# EAGLE board servo_1 (EAGLE 6.5.0)
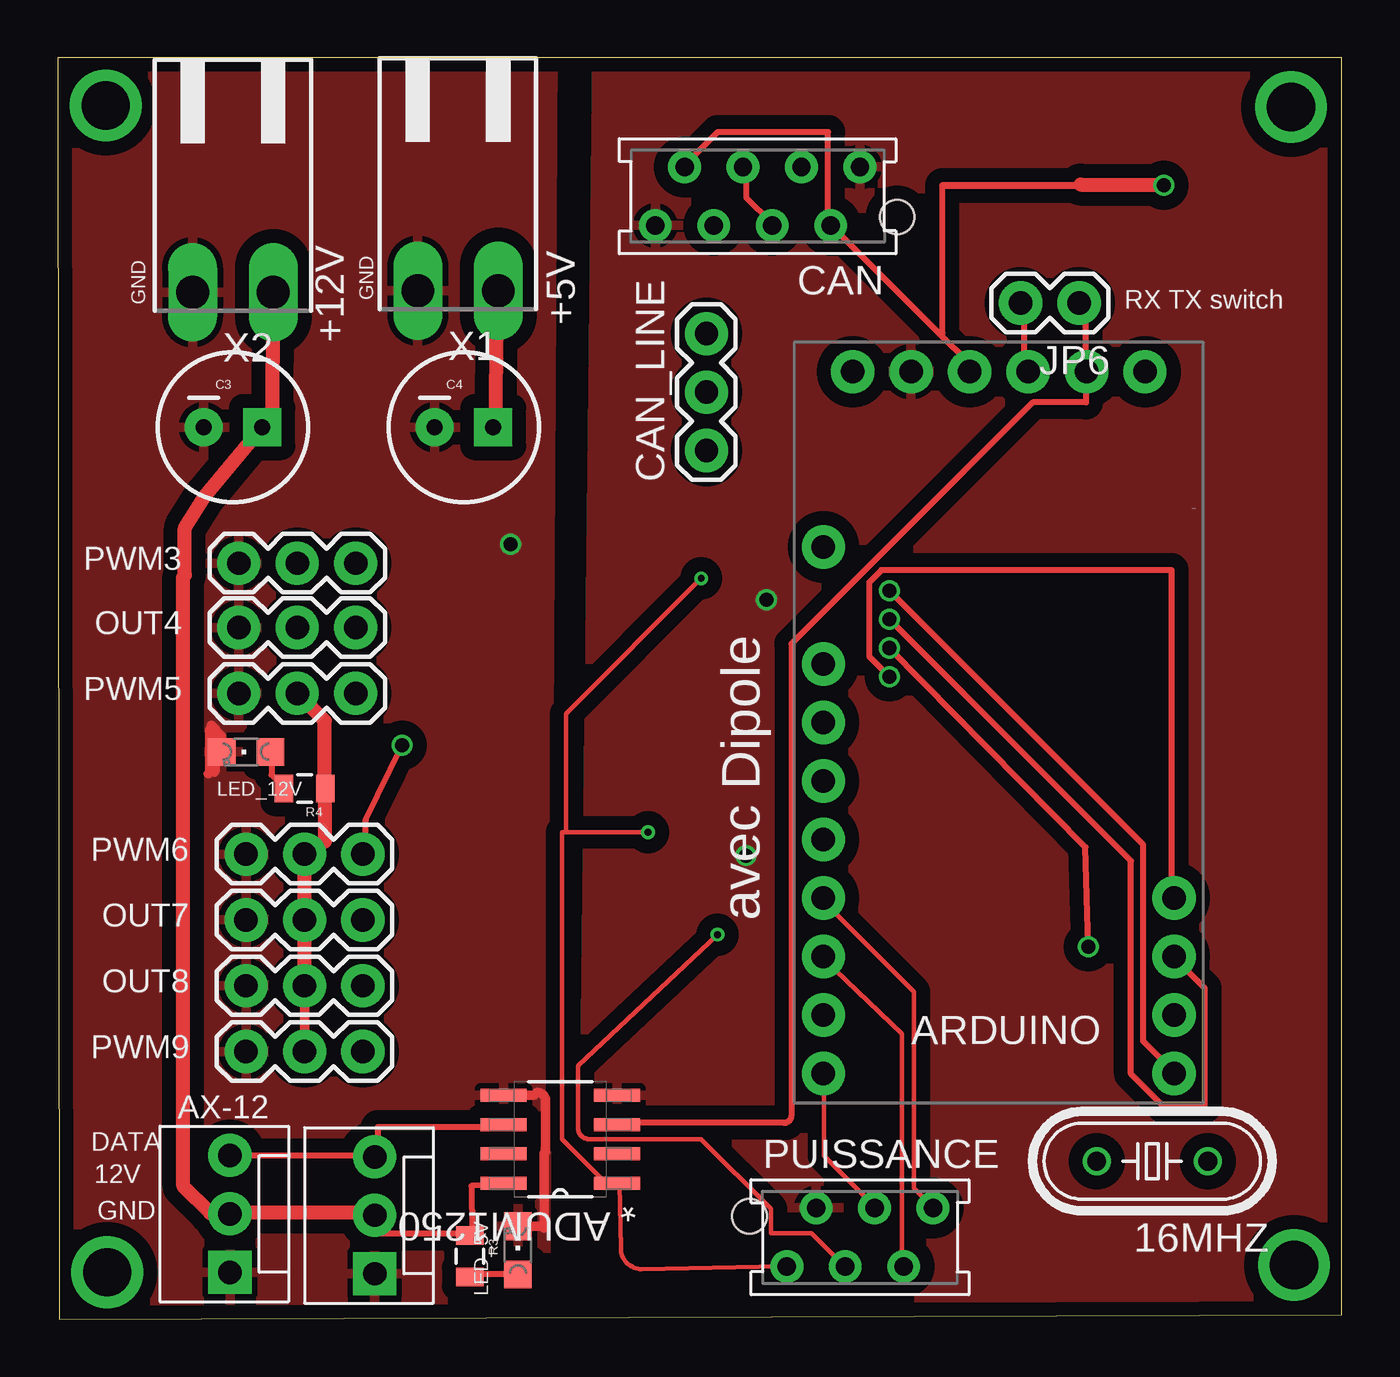
[diagram p0: board, top side]
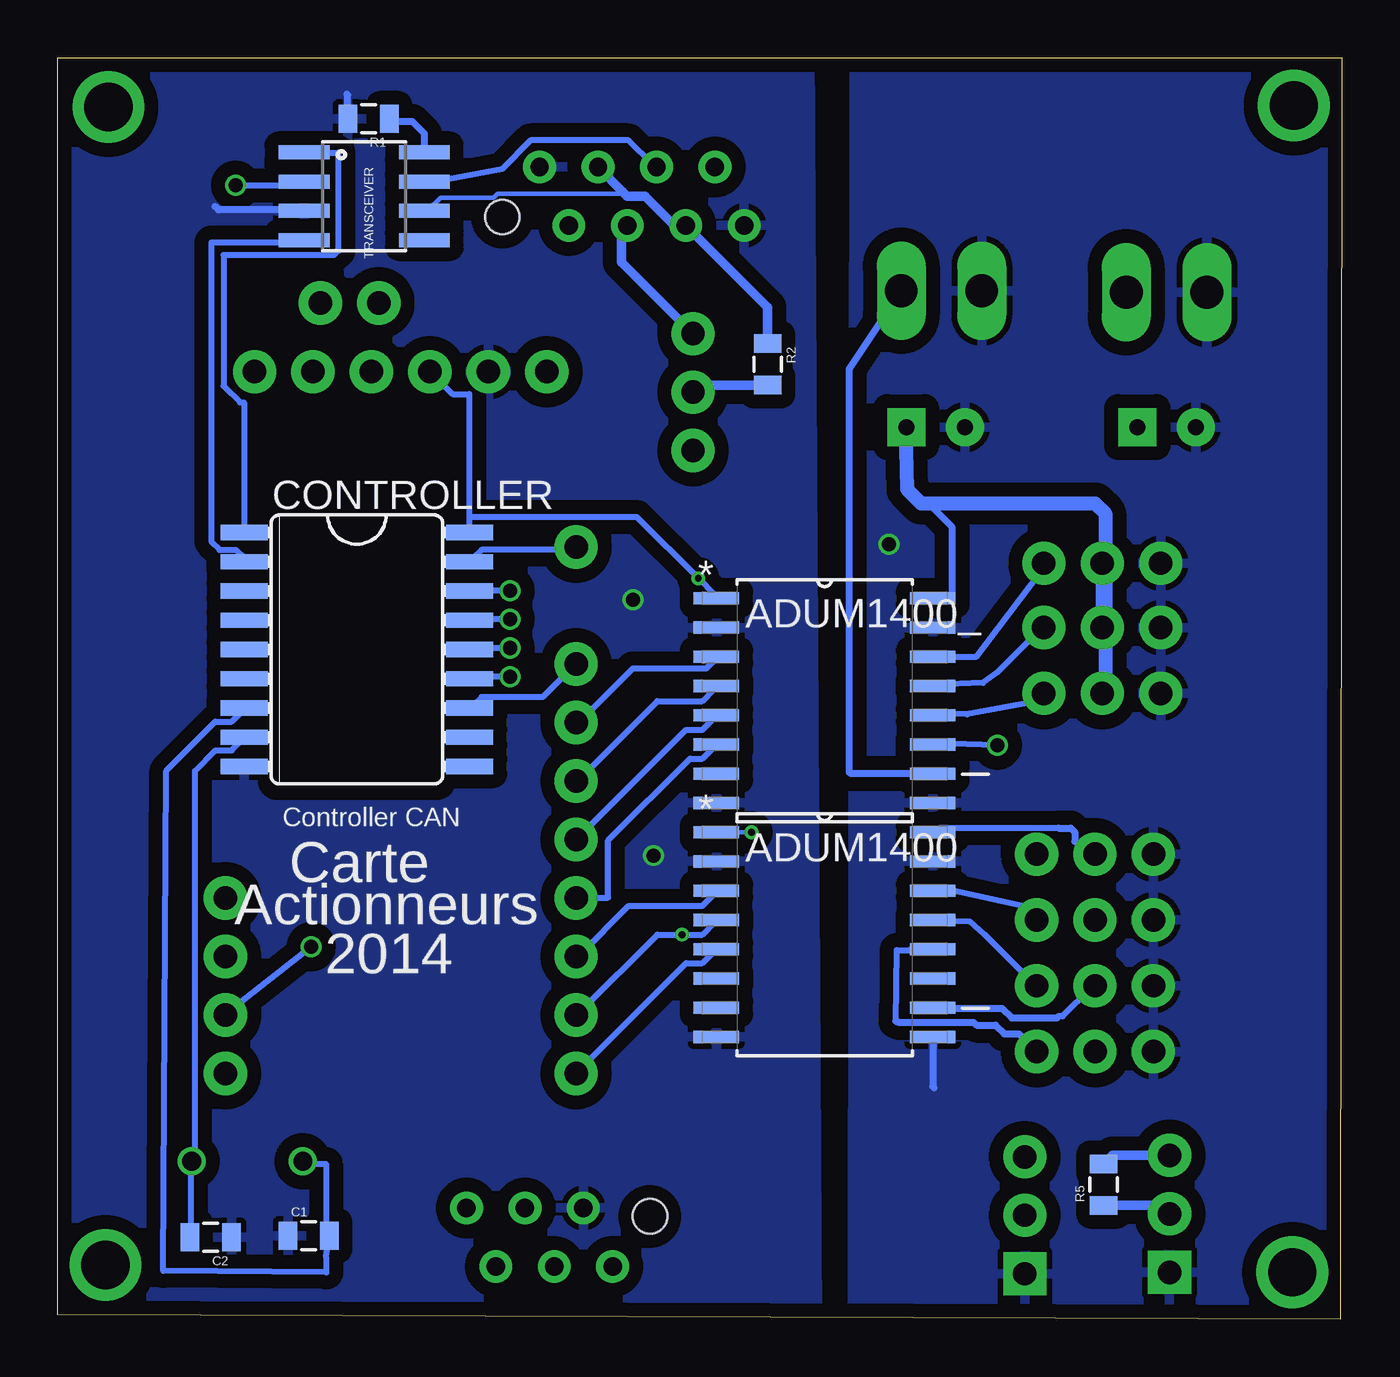
[diagram p1: board, bottom side, seen from below]

Size 55.8 x 54.79 mm. Coordinates in mm from the lower left corner, seen from the top.
Outline: 0.06,0 55.8,0.19 55.8,54.79 0,54.79 0.06,0
Copper layers (1*16): Top 0.035mm / dielectric 1.6mm / Bottom 0.035mm
Design rules "dipole": minimum track width 0.2mm, minimum drill 0.3mm, track to track 0.15mm, track to pad 0.15mm, pad to pad 0.15mm, via to via 0.15mm, smd to smd 0.01mm, copper to edge 0.01mm, drill to drill 0.01mm, minimum pad ring 0.15mm, minimum via ring 0.15mm, stop-mask expansion 1mil, vias tented up to drill 0mil, thermal gap 10mil
Net classes: 0 default: clearance 0.205 mm
bRestrict: area 39.3,23.4 to 46.3,34.5

## Footprints (pad centres in the part's own frame; a part is rotated, then mirrored left to right if it is on the bottom)
HC49/S = drill 0.813: 1 -2.413,0; 2 2.413,0
SOIC127P600X175-8N = smd 1.981 x 0.559: 1 -2.464,1.905; 2 -2.464,0.635; 3 -2.464,-0.635; 4 -2.464,-1.905; 5 2.464,-1.905; 6 2.464,-0.635; 7 2.464,0.635; 8 2.464,1.905
SOIC127P1032X265-16N = smd 1.981 x 0.533: 1 -4.699,4.445; 2 -4.699,3.175; 3 -4.699,1.905; 4 -4.699,0.635; 5 -4.699,-0.635; 6 -4.699,-1.905; 7 -4.699,-3.175; 8 -4.699,-4.445; 9 4.699,-4.445; 10 4.699,-3.175; 11 4.699,-1.905; 12 4.699,-0.635; 13 4.699,0.635; 14 4.699,1.905; 15 4.699,3.175; 16 4.699,4.445
ARDUINO_PRO_MINI = drill 1.016 pad 1.88: 3 -7.62,7.62; 5 -7.62,2.54; 6 -7.62,0; 7 -7.62,-2.54; 8 -7.62,-5.08; 9 -7.62,-7.62; 10 -7.62,-10.16; 11 -7.62,-12.7; 12 -7.62,-15.24; 13 7.62,-15.24; 14 7.62,-12.7; 15 7.62,-10.16; 16 7.62,-7.62; BLK -6.35,15.24; GND -3.81,15.24; GRN 6.35,15.24; RXI 1.27,15.24; TXO 3.81,15.24; VCC -1.27,15.24
0805 = smd 0.8 x 1.2: 1 -0.9,0; 2 0.9,0
CPOL-RADIAL-100UF-25V = drill 0.7 pad 1.651 square: 1 1.27,0 | drill 0.7 pad 1.651: 2 -1.27,0
AMP-215079-8 = drill 0.8 pad 1.422: 1 0,-1.27; 2 1.27,1.27; 3 2.54,-1.27; 4 3.81,1.27; 5 5.08,-1.27; 6 6.35,1.27; 7 7.62,-1.27; 8 8.89,1.27 | hole 1.5: -1.62,0.905
1X03 = drill 1.016 pad 1.88: 1 0,0; 2 2.54,0; 3 5.08,0
SO18L = smd 0.66 x 2.032: 1 -5.08,-4.902; 2 -3.81,-4.902; 3 -2.54,-4.902; 4 -1.27,-4.902; 5 0,-4.902; 6 1.27,-4.902; 7 2.54,-4.902; 8 3.81,-4.902; 9 5.08,-4.902; 10 5.08,4.902; 11 3.81,4.902; 12 2.54,4.902; 13 1.27,4.902; 14 0,4.902; 15 -1.27,4.902; 16 -2.54,4.902; 17 -3.81,4.902; 18 -5.08,4.902
MOLEX-1X3 = drill 1.016 pad 1.88 square: 1 0,0 | drill 1.016 pad 1.88: 2 2.54,0; 3 5.08,0
1X02 = drill 1.016 pad 1.88: 1 0,0; 2 2.54,0
CHIPLED_0805 = smd 1.2 x 1.2: A 0,-1.05; C 0,1.05
AMP-215079-6 = drill 0.8 pad 1.422: 1 0,0; 2 1.27,2.54; 3 2.54,0; 4 3.81,2.54; 5 5.08,0; 6 6.35,2.54 | hole 1.5: -1.62,2.175
SO08 = smd 0.61 x 2.21: 1 -1.905,-2.616; 2 -0.635,-2.616; 3 0.635,-2.616; 4 1.905,-2.616; 5 1.905,2.616; 6 0.635,2.616; 7 -0.635,2.616; 8 -1.905,2.616
90-2 = drill 1.422 long: 1 -1.75,5.25; 2 1.75,5.25

## Placement (x,y rotation side)
16MHZ  16MHz  [HC49/S]  47.56,6.86 180 top
ADUM1250  ADUM1250ARZ  [SOIC127P600X175-8N]  21.84,7.81 180 top
ADUM1400  ADUM1400ARWZ  [SOIC127P1032X265-16N]  22.48,16.7 0 bottom
ADUM1400_  ADUM1400ARWZ  [SOIC127P1032X265-16N]  22.48,26.86 0 bottom
ARDUINO  ARDUINO_PRO_MINI'SERVO  [ARDUINO_PRO_MINI]  40.89,25.91 0 top
C1  22pF  [0805]  44.89,3.62 0 bottom
C2  22pF  [0805]  49.15,3.56 180 bottom
C3  100uF  [CPOL-RADIAL-100UF-25V]  7.62,38.73 0 top
C4  100uF  [CPOL-RADIAL-100UF-25V]  17.65,38.73 0 top
CAN  [AMP-215079-8]  34.86,48.77 180 top
CAN_LINE  JUMPER-3PTH  [1X03]  28.19,37.72 90 top
CONTROLLER  MCP2515SO  [SO18L]  42.8,29.08 270 bottom
JP2  AX-12_1  [MOLEX-1X3]  13.78,1.97 90 top
JP4  AX-12_2  [MOLEX-1X3]  7.49,2.03 90 top
JP6  RX_TX_Connxion  [1X02]  44.39,44.13 180 top
LED_5V  [CHIPLED_0805]  20,2.98 0 top
LED_12V  [CHIPLED_0805]  8.19,24.64 90 top
OUT4  PWM4  [1X03]  12.95,30.04 180 top
OUT7  PWM7  [1X03]  13.27,17.34 180 top
OUT8  servo_option_1  [1X03]  13.27,14.48 180 top
PUISSANCE  MMATCH-6-  [AMP-215079-6]  31.69,2.29 0 top
PWM3  PWM3  [1X03]  12.95,32.83 180 top
PWM5  PWM5  [1X03]  12.95,27.18 180 top
PWM6  servo_option  [1X03]  13.27,20.19 180 top
PWM9  servo_option_2  [1X03]  13.27,11.62 180 top
R1  4,7k  [0805]  42.29,52.13 180 bottom
R2  120  [0805]  24.96,41.47 270 bottom
R3  1k  [0805]  17.91,2.73 270 top
R4  1k  [0805]  10.73,23.05 180 top
R5  10k  [0805]  10.35,5.84 90 bottom
TRANSCEIVER  MCP2551  [SO08]  42.48,48.77 270 bottom
X1  5V_INPUT  [90-2]  17.4,49.91 180 top
X2  12V_INPUT  [90-2]  7.62,49.85 180 top

## Library data of the parts
16MHZ = adafruit; MF: MULTICOMP; MPN: HC49SM-3.6864-30-50-60-16-ATF; OC_FARNELL: 1667008; OC_NEWARK: unknown
ADUM1250 = Analog Devices_By_element14_Batch_1; MF: ANALOG DEVICES; MPN: ADUM1250ARZ; OC_FARNELL: 1814353; OC_NEWARK: 27M9880; PACKAGE: SOIC-8; SUPPLIER: Analog Devices
ADUM1400 ADUM1400_ = Analog Devices_By_element14_Batch_1; MF: ANALOG DEVICES; MPN: ADUM1400ARWZ; OC_FARNELL: 1226217; OC_NEWARK: 19M8755; PACKAGE: SOIC-16; SUPPLIER: Analog Devices
ARDUINO = can_bus_servo; OC_FARNELL: unknown
C1 C2 = SparkFun-Capacitors; MF: AVX; MPN: 08055A220JAT2A; OC_FARNELL: 2280675RL
C3 C4 = SparkFun-Capacitors; MF: RUBYCON; MPN: 100TXW100MEFC8X30; OC_FARNELL: 2346289
CAN = jt-con-micromatch; OC_FARNELL: unknown
CAN_LINE = SparkFun-Passives
CONTROLLER = MCP2515_MT; OC_FARNELL: unknown
JP2 JP4 OUT4 OUT7 OUT8 PWM3 PWM5 PWM6 PWM9 = SparkFun-Connectors; OC_FARNELL: unknown
JP6 R1-R5 = SparkFun-Passives; OC_FARNELL: unknown
LED_5V LED_12V = adafruit
PUISSANCE = jt-con-micromatch
TRANSCEIVER = SparkFun-DigitalIC; MF: MICROCHIP; MPN: MCP2551-I/SN...; OC_FARNELL: 2119745
X1 X2 = con-weidmueller-sl35; OC_FARNELL: unknown; OC_NEWARK: unknown

## Nets
5V_DIRTY: ADUM1400.10 ADUM1400.16 ADUM1400_.10 ADUM1400_.16 C4.1 OUT4.2 OUT7.2 OUT8.2 PWM3.2 PWM5.2 PWM6.2 PWM9.2 R4.1 X1.1
12V_DIRTY: ADUM1250.8 C3.1 JP2.2 JP4.2 R3.1 R5.1 X2.1
CAN_CS: ARDUINO.13 CONTROLLER.16
CAN_INT: ARDUINO.5 CONTROLLER.12
CAN_RXD: CONTROLLER.2 TRANSCEIVER.4
CAN_TXD: CONTROLLER.1 TRANSCEIVER.1
CANH: CAN.4 CAN.5 CAN_LINE.3 TRANSCEIVER.7
CANL: CAN.3 CAN.6 R2.1 TRANSCEIVER.6
GND: ADUM1250.4 ADUM1400.2 ADUM1400.8 ADUM1400_.2 ADUM1400_.8 ARDUINO.GND C1.1 C2.1 CAN.1 CAN.8 CONTROLLER.9 PUISSANCE.2 R1.2 TRANSCEIVER.3
GND_DIRTY: ADUM1250.5 ADUM1400.9 ADUM1400.15 ADUM1400_.9 ADUM1400_.15 C3.2 C4.2 JP2.1 JP4.1 LED_5V.C LED_12V.C OUT4.3 OUT7.3 OUT8.3 PWM3.3 PWM5.3 PWM6.3 PWM9.3 X1.2 X2.2
MISO: ARDUINO.15 CONTROLLER.15
MOSI: ARDUINO.14 CONTROLLER.14
N$2: 16MHZ.2 C1.2 CONTROLLER.7
N$3: 16MHZ.1 C2.2 CONTROLLER.8
N$4: LED_5V.A R3.2
N$5: R1.1 TRANSCEIVER.8
N$6: LED_12V.A R4.2
N$7: CAN_LINE.2 R2.2
OUT4: ADUM1400_.4 ARDUINO.7
OUT7: ADUM1400.3 ARDUINO.10 PUISSANCE.5
OUT8: ADUM1400.4 ARDUINO.11 PUISSANCE.3
PWM3: ADUM1400_.3 ARDUINO.6
PWM3_OUT: ADUM1400_.14 PWM3.1
PWM4_OUT: ADUM1400_.13 OUT4.1
PWM5: ADUM1400_.5 ARDUINO.8
PWM5_OUT: ADUM1400_.12 PWM5.1
PWM6: ADUM1400_.6 ARDUINO.9 PUISSANCE.6
PWM6_OUT: ADUM1400_.11 PWM6.1
PWM7_OUT: ADUM1400.14 OUT7.1
PWM8_OUT: ADUM1400.13 OUT8.1
PWM9: ADUM1400.5 ARDUINO.12 PUISSANCE.4
PWM9_OUT: ADUM1400.12 PWM9.1
RST: ARDUINO.3 CONTROLLER.17
RXI: ARDUINO.RXI JP6.2
RXTX_OUT: ADUM1250.6 JP2.3 JP4.3 R5.2
SCK: ARDUINO.16 CONTROLLER.13
TXO: ADUM1250.3 ARDUINO.TXO JP6.1
VCC: ADUM1250.1 ADUM1400.1 ADUM1400_.1 ARDUINO.VCC CAN.2 CAN.7 CONTROLLER.18 PUISSANCE.1 TRANSCEIVER.2

## Tracks (layer width: path | path; a pad name or v marks a point on that pad's centre or on a via)
5V_DIRTY
  Top 0.254: 19.08,43.37 X1.1 | 11.61,22.92 R4.1 11.61,23.1 | 10.9,19.9 PWM6.2 10.72,19.72 | 10.72,17.41 OUT7.2 10.72,17.23 | 10.54,27.01 PWM5.2 | 10.72,14.57 OUT8.2
  Top 0.406: 10.72,14.76 arc-5 10.8,14.48 10.8,14.67 10.73,14.73 10.73,11.68 10.8,11.62 PWM9.2 10.67,11.56
  Top 0.61: PWM5.2 11.61,25.98 11.61,22.92 11.61,20.75 PWM6.2 | 10.72,19.72 10.72,17.35 OUT7.2 | 10.72,17.23 10.72,14.76 10.72,14.49 OUT8.2 | 19.08,43.37 19.01,38.76 C4.1
  Bottom 0.254: 17.83,31.46 ADUM1400_.16 | 18.96,38.6 C4.1 | 12.32,13.14 12.14,13.14 10.9,14.39 OUT8.2 | 10.9,11.72 PWM9.2 | 12.32,21.32 17.48,21.32 17.65,21.15 ADUM1400.16 | 10.9,19.9 PWM6.2 | 17.65,13.5 ADUM1400.10
  Bottom 0.305: 17.65,13.5 14.77,13.5 14.35,13.08 12.38,13.08 12.32,13.14 | ADUM1400_.10 21.34,23.69 21.4,23.75 21.4,41.27 X1.1 | 18.29,35.43 17.97,35.43 16.95,34.42 16.95,31.37 17.08,31.24 17.72,31.24 ADUM1400_.16 | 12.32,21.32 11.79,21.32 11.61,21.15 11.61,20.75 PWM6.2
  Bottom 0.61: 18.96,38.6 18.9,36.04 18.29,35.43 10.73,35.43 10.29,34.99 10.29,32.7 | 10.29,32.7 10.29,27.3 PWM5.2 | 10.29,32.7 PWM3.2 OUT4.2
12V_DIRTY
  Top 0.254: ADUM1250.8 19.25,5.85 17.98,5.79 18.01,3.72 R3.1 17.83,3.72 13.92,3.72 13.92,4.43 JP2.2 13.74,4.61 | 7.52,4.61 JP4.2 7.34,4.61
  Top 0.61: X2.1 9.31,38.45 C3.1 6.41,35.75 5.52,34.35 5.52,32.32 5.46,32.26 5.46,5.78 6.63,4.61 7.53,4.61 | 13.74,4.61 7.53,4.61 | 7.53,4.61 JP4.2
  Bottom 0.406: R5.1 7.86,4.94 JP4.2
CAN_CS  (via drill 0.61)
  Top 0.254: v36.14,31.64 47.17,20.61 47.17,12.08 48.41,10.83 ARDUINO.13
  Bottom 0.254: v36.14,31.64 37.74,31.64 CONTROLLER.16
CAN_INT
  Bottom 0.254: CONTROLLER.12 37.74,26.66 37.39,27.01 34.72,27.01 33.3,28.44 ARDUINO.5
CAN_RXD
  Bottom 0.254: CONTROLLER.2 47.7,33.06 48.06,33.41 48.77,33.41 49.12,33.77 49.12,46.75 45.21,46.75 TRANSCEIVER.4
CAN_TXD
  Bottom 0.254: CONTROLLER.1 47.7,39.81 47.88,39.81 48.59,40.53 48.59,46.22 43.79,46.22 43.61,46.39 43.61,50.66 45.03,50.66 TRANSCEIVER.1
CANH
  Top 0.254: CAN.4 30.99,47.64 29.92,48.7 29.92,49.95 CAN.5
  Bottom 0.254: TRANSCEIVER.7 39.7,49.42 39.17,49.44 36.5,49.95 35.26,51.19 30.99,51.19 29.92,50.13 CAN.5
  Bottom 0.406: CAN_LINE.3 31.31,45.91 31.31,47.24 CAN.4
CANL
  Bottom 0.2: TRANSCEIVER.6 39.7,48.17 39.17,48.7 36.86,48.7 36.68,48.88 31.34,48.88 31.26,48.97
  Bottom 0.406: R2.1 24.96,43.94 CAN.6 29.02,47.5 30.29,48.77 31.05,48.77 31.26,48.97 CAN.3
GND  (via drill 0.6)
  Top 0.2: CAN.1 34.9,50.13 CAN.1
  Bottom 0.254: 45.21,48.17 TRANSCEIVER.3
  Bottom 0.305: R1.2 43.19,53.16 43.24,53.21 | 45.21,48.17 48.81,48.17 48.96,48.32
  other vias: 29.91,20.13 30.8,31.24
  pour Bottom (isolate 0.61): 22.8,-0.13 54.86,0.83 55.82,0.83 56.13,54.8 23.11,55.44
  pour Top (isolate 0.61): 22.8,0.19 55.82,0.83 55.5,54.8 23.43,55.12
GND_DIRTY  (via drill 0.6)
  Top 0.2: 8.23,17.41 OUT7.3 | LED_5V.C 19.96,4.08 20.1,3.94
  Top 0.406: LED_12V.C 7.14,25.31 6.67,25.78 6.67,23.88 6.79,23.75 6.86,23.81 6.86,25.34 6.6,25.59 6.6,23.75 6.54,23.69 | ADUM1250.5 20.7,9.72 20.83,9.84 arc-90 21.21,9.46 21.21,7.24 arc90 21.15,7.18 21.15,3.94 arc90 21.05,4.03 LED_5V.C
  Bottom 0.305: ADUM1400.9 17.78,10.1 17.72,10.03
  other vias: 19.69,33.66
  pour Bottom (isolate 0.61): -0.83,55.31 -2.86,-0.64 21.27,0 21.21,55.12 13.4,55.24
  pour Top (isolate 0.61): -2.79,-0.38 21.21,0 21.53,55.12 -0.76,55.37
MISO  (via drill 0.61)
  Top 0.254: v36.14,30.39 46.63,19.9 46.63,10.66 48.06,9.23 49.84,9.23 49.84,14.39 48.59,15.63 ARDUINO.15
  Bottom 0.254: v36.14,30.39 37.74,30.39 CONTROLLER.15
MOSI  (via drill 0.61)
  Top 0.254: v36.14,29.15 44.67,20.5 v44.79,16.18
  Bottom 0.254: v36.14,29.15 37.74,29.15 CONTROLLER.14 | v44.79,16.18 48.41,13.32 ARDUINO.14
N$1
  Bottom 0.406: 17.72,23.69 18.03,23.69
N$2
  Bottom 0.254: 44.86,6.74 45.03,6.74 16MHZ.2 44.86,6.74 | 44.86,6.74 44.15,6.74 44.15,3.72 C1.2 44.15,2.72 44.13,2.03 51.21,2.1 51.08,23.81 48.95,25.95 48.24,25.95 47.7,26.48 CONTROLLER.7
N$3
  Bottom 0.254: C2.2 50.01,3.72 50.01,6.74 16MHZ.1 49.84,6.92 49.84,23.81 48.95,24.7 48.24,24.7 47.7,25.23 CONTROLLER.8
N$4
  Top 0.254: R3.2 18.01,1.94 19.96,1.94 LED_5V.A
N$5
  Bottom 0.305: TRANSCEIVER.8 39.87,51.49 40.39,52.01 41.26,52.01 R1.1
N$6
  Top 0.254: R4.2 9.83,23.1 9.3,23.63 9.3,24.52 LED_12V.A
N$7
  Bottom 0.406: R2.2 27.89,40.57 CAN_LINE.2
N$8  (via drill 2.1 pad 2.18)
  other vias: 2.16,2.03
N$9  (via drill 2.1 pad 2.18)
  other vias: 53.72,2.35
N$10  (via drill 2.1 pad 2.18)
  other vias: 2.1,52.7
N$12  (via drill 2.1 pad 2.18)
  other vias: 53.59,52.64
OUT4
  Bottom 0.2: 33.12,23.46 ARDUINO.7
  Bottom 0.254: 33.12,23.46 29.74,26.84 27.79,26.84 27.25,27.37 ADUM1400_.4
OUT7
  Top 0.2: PUISSANCE.5 36.68,2.43 36.68,12.38 33.3,15.63 ARDUINO.10
  Bottom 0.2: 33.12,15.81 ARDUINO.10
  Bottom 0.254: 33.12,15.81 30.99,17.95 27.79,17.95 27.25,18.48 ADUM1400.3
OUT8  (via drill 0.3)
  Top 0.2: v28.68,16.7 22.61,11.01 22.61,8.32 arc90 23.12,7.81 27.97,7.81 30.99,4.79 30.99,3.72 32.77,3.72 34.19,2.3 PUISSANCE.3
  Bottom 0.2: 33.12,13.32 ARDUINO.11
  Bottom 0.254: 33.12,13.32 29.74,16.7 v28.68,16.7 27.79,16.7 27.25,17.23 ADUM1400.4
PWM3
  Bottom 0.254: ADUM1400_.3 27.25,28.61 27.61,28.26 30.81,28.26 33.12,25.95 ARDUINO.6
PWM3_OUT
  Bottom 0.254: ADUM1400_.14 17.65,28.79 16.8,28.75 15.91,28.75 13.03,32.52 PWM3.1
PWM4_OUT
  Bottom 0.254: ADUM1400_.13 17.65,27.55 15.6,27.64 14.99,28.08 13.03,30.04 OUT4.1
PWM5
  Bottom 0.254: ADUM1400_.5 27.25,26.12 27.79,25.59 28.5,25.59 33.12,20.97 ARDUINO.8
PWM5_OUT
  Bottom 0.254: ADUM1400_.12 17.65,26.3 16.29,26.26 13.21,26.84 13.03,27.01 PWM5.1
PWM6
  Top 0.2: PUISSANCE.6 37.92,4.97 37.21,5.68 37.21,14.21 33.3,18.12 ARDUINO.9
  Bottom 0.254: ADUM1400_.6 27.79,24.35 28.32,24.35 31.88,20.79 31.88,18.3 33.12,18.3 ARDUINO.9
PWM6_OUT  (via drill 0.61)
  Top 0.254: v14.97,24.92 13.39,21.68 13.39,19.9 PWM6.1
  Bottom 0.254: v14.97,24.92 16.99,24.98 17.65,24.88 ADUM1400_.11
PWM7_OUT
  Bottom 0.254: ADUM1400.14 16.8,18.58 13.92,17.95 13.39,17.41 OUT7.1
PWM8_OUT
  Bottom 0.254: ADUM1400.13 17.65,17.23 16.17,17.27 15.52,16.7 13.39,14.57 OUT8.1
PWM9
  Top 0.2: PUISSANCE.4 35.43,4.97 33.3,7.1 33.3,10.66 ARDUINO.12
  Bottom 0.254: ADUM1400.5 27.79,15.46 28.5,15.46 33.12,10.83 ARDUINO.12
PWM9_OUT
  Bottom 0.254: 19.38,12.94 19.34,16.03 18.81,16.03 17.83,15.99 ADUM1400.12 | 13.39,11.54 PWM9.1
  Bottom 0.305: 19.38,12.94 19.25,12.9 19.24,12.89 16,12.89 15.88,12.76 15.05,12.76 14.67,12.38 14.03,12.38 PWM9.1
RST
  Bottom 0.254: CONTROLLER.17 37.74,33.06 37.39,33.41 33.3,33.41 ARDUINO.3
RXI
  Top 0.254: JP6.2 42.01,43.55 42.01,41.24 ARDUINO.RXI
RXTX_OUT
  Top 0.254: ADUM1250.6 19.25,8.34 13.92,8.34 13.92,7.1 JP2.3 13.74,7.1 7.52,7.1 JP4.3
  Bottom 0.406: JP4.3 9.98,7.11 R5.2
SCK  (via drill 0.61)
  Top 0.254: v36.14,27.9 35.26,28.79 35.26,31.99 35.79,32.52 48.41,32.52 48.41,18.3 ARDUINO.16
  Bottom 0.254: v36.14,27.9 37.74,27.9 CONTROLLER.13
TXO
  Top 0.254: ADUM1250.3 24.41,8.52 31.57,8.52 arc90 31.88,8.83 31.88,29.32 42.37,39.81 44.68,39.81 44.68,41.06 ARDUINO.TXO 44.68,41.24 44.68,43.37 44.5,43.55 JP6.1
VCC  (via drill 0.3, 0.61)
  Top 0.2: 22.1,21.15 21.92,21.15 21.92,7.81 23.7,6.03 24.23,6.03 ADUM1250.1 24.41,5.85 24.47,3.08 arc90 25.38,2.17 31.52,2.3 PUISSANCE.1 | 22.1,21.15 v25.65,21.15 | 22.1,21.15 22.1,26.3 v27.97,32.17
  Top 0.254: 38.37,42.75 39.52,41.59 39.52,41.24 ARDUINO.VCC | 38.37,42.75 33.66,47.46 CAN.2 33.48,47.64 33.48,51.55 28.68,51.55 27.25,50.13 CAN.7 | 38.46,49.24 38.46,42.84 38.37,42.75
  Top 0.305: 38.46,49.24 44.41,49.24 44.45,49.28
  Top 0.61: 44.45,49.28 48.03,49.28 v48.07,49.24
  Bottom 0.2: v25.65,21.15 ADUM1400.1
  Bottom 0.254: 37.92,34.84 37.92,40.17 38.63,40.17 39.52,41.06 ARDUINO.VCC | 37.92,34.84 37.92,34.3 CONTROLLER.18 | 37.92,34.84 30.63,34.84 v27.97,32.17 27.25,31.46 ADUM1400_.1 | v48.07,49.24 45.21,49.24 TRANSCEIVER.2

## Text on the board
tNames: GND | GND | RX TX switch | +12V | +5V | 2014 | avec Dipole | AX-12 | DATA | 12V | GND
bNames: Controller CAN | Carte | Actionneurs | 2014